# Altium PCB PCB2.PcbDoc
Units mm, origin at the board's own origin, x right, y up, seen from the top; angles counter-clockwise.
Board outline 275.08 x 77 mm, 2 copper layers (Top Layer, Bottom Layer); 16 components, 40 nets, 152 pads, 16 vias.
Unrouted connection lines stored in the file: 15.
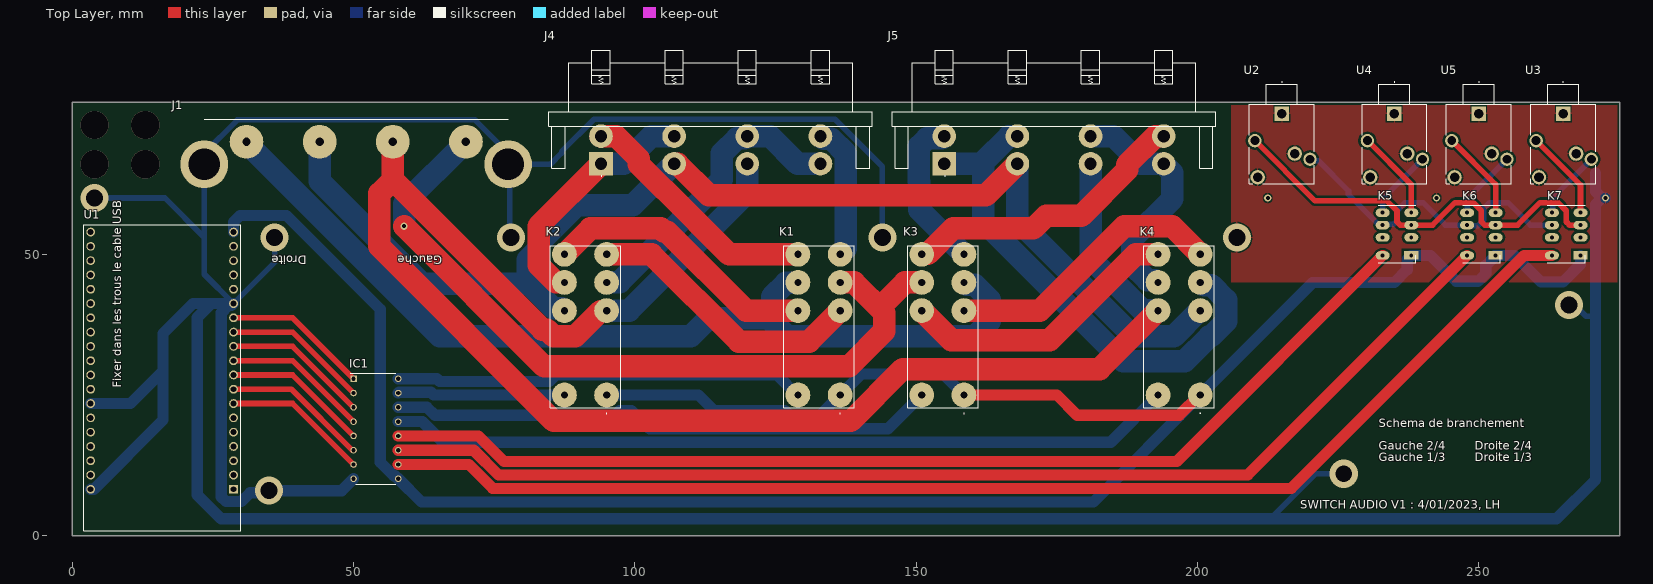
[diagram p0: Top Layer view]
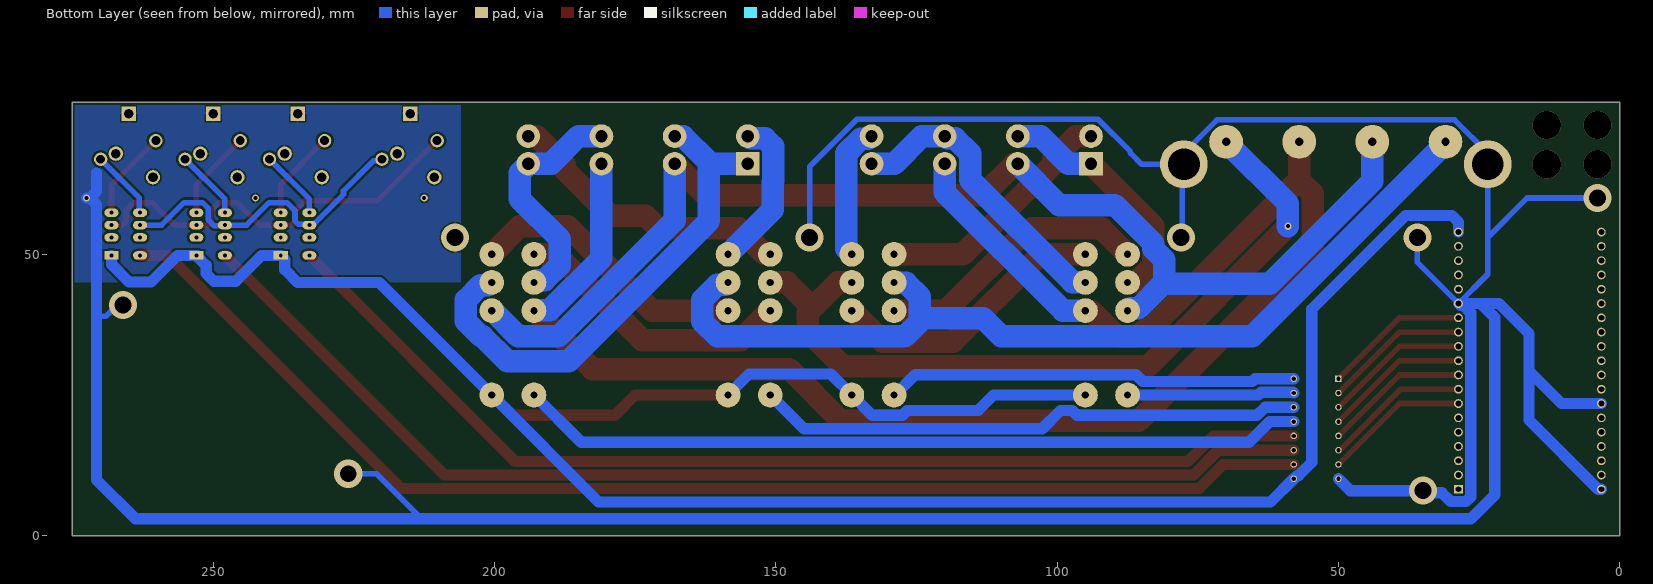
[diagram p1: Bottom Layer view, seen from below]
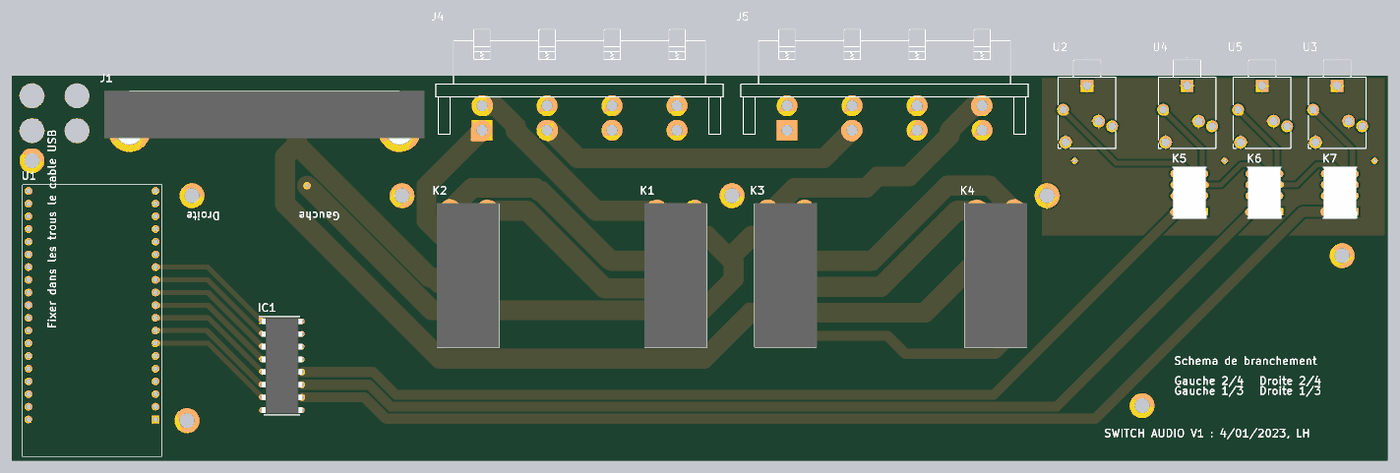
[diagram p2: 3D render of the assembled board from above, using the file's embedded part models]

## Layer stack, top to bottom
Top Solder: solder mask 0.0102, Solder Resist, Dk 3.5
Top Layer: signal copper 0.0356
Dielectric 1: dielectric 0.32, FR-4, Dk 4.8
Bottom Layer: signal copper 0.0356
Bottom Solder: solder mask 0.0102, Solder Resist, Dk 3.5

## Board outline
0,0 275.082,0 275.082,77 0,77

## Design rules (kind name [scope] priority, off if disabled: settings)
BoardOutlineClearance Default [All] p1: gap=0.5 ignorepadtopadclearanceinfootprint=FALSE
Clearance [All] p1: gap=0.4 ignorepadtopadclearanceinfootprint=FALSE
HoleSize [All] p1: absolutevalues=TRUE maxlimit=6.3 minlimit=0.5 maxpercent=80.000 minpercent=20.000
HoleToHoleClearance [All] p1: gap=1 allowstackedmicrovias=TRUE
PasteMaskExpansion [All] p1: expansion=0.2
PolygonConnect [All] p1: connectstyle=Relief reliefconductorwidth=0.254 reliefentries=4 polygonreliefangle="90 Angle" airgapwidth=0.254
RoutingVias [All] p1: holewidth=0.711 width=1.27 viastyle="Through Hole" minholewidth=0.711 minwidth=1.27 maxholewidth=0.711 maxwidth=1.27
SilkToSilkClearance [All] p1: silktosilkclearance=0.3
SilkToSolderMaskClearance [IsPad] p1: minsilkscreentomaskgap=0.2 clearancetoexposedcopper=FALSE
SolderMaskExpansion [All] p1: expansion=0.1 istentingtop=FALSE
UnRoutedNet [All] p1: checkbadconnections=TRUE
Width [All] p1: maxlimit=15 minlimit=0.254 preferedwidth=1
24 further rules are at their usual default settings.

## Components (designator, comment, footprint, x,y, rotation, side; value= is the part's Value field where it differs from the comment)
IC1 "ULN2003A" DIP794W56P254L1918H533Q16N 54,19 r0 top
J1 "FC681508" FC681508 31,70 r0 top
J4 "737763" 737763 94,66.1 r180 top
J5 "737763" 737763 155,66.1 r180 top
K1 "G2RL-24-DC5" G2RL24DC5 136.5,25 r90 top
K2 "G2RL-24-DC5" G2RL24DC5 95,25 r90 top
K3 "G2RL-24-DC5" G2RL24DC5 158.5,25 r90 top
K4 "G2RL-24-DC5" G2RL24DC5 200.5,25 r90 top
K5 "G6K-2P-Y-DC5" G6K2PYDC12 238,49.8 r180 top
K6 "G6K-2P-Y-DC5" G6K2PYDC12 253,49.8 r180 top
K7 "G6K-2P-Y-DC5" G6K2PYDC12 268.08,49.8 r180 top
U1 "ESP32-DEVKITC-32D" MODULE_ESP32-DEVKITC-32D 16,28 r180 top
U2 "734101" 734101 215,75 r270 top
U3 "734101" 734101 265,75 r270 top
U4 "734101" 734101 235,75 r270 top
U5 "734101" 734101 250,75 r270 top

## Footprints (in the part's own frame and the unit in brackets; to place one, negate y for a bottom-side part, rotate by r counter-clockwise, add the part's x,y. Pads: shape width x height; smd on the part's side, far side on the other; paste and mask are expansions set on the pad)
734101 [mm]
  rect 2.55x2.55 hole 1.7: 1(0,0)
  round 2.37 hole 1.58: 2(8.1,5) 5(4.8,-4.8)
  round 2.55 hole 1.7: 3(7.1,2.3) 4(11.3,-4.3)
  silkscreen extent -5.7,-5.75 12.5,5.75
737763 [mm]
  rect 4.2x4.2 hole 2.2: 1(0,0)
  round 4.2 hole 2.2: 2(0,-4.9) 3(-13,0) 4(-13,-4.9) 5(-26,0) 6(-26,-4.9) 7(-39,0) 8(-39,-4.9)
  silkscreen extent -48.25,-20.2 9.25,2.2
DIP794W56P254L1918H533Q16N [mm]
  rect 1.16x1.16 hole 0.76: 1(-3.97,8.89)
  round 1.16 hole 0.76: 2(-3.97,6.35) 3(-3.97,3.81) 4(-3.97,1.27) 5(-3.97,-1.27) 6(-3.97,-3.81) 7(-3.97,-6.35) 8(-3.97,-8.89) 9(3.97,-8.89) 10(3.97,-6.35) 11(3.97,-3.81) 12(3.97,-1.27) 13(3.97,1.27) 14(3.97,3.81) 15(3.97,6.35) 16(3.97,8.89)
  silkscreen extent -4.55,-9.84 3.55,9.84, body extent -4.11,-9.59 4.11,9.59, height 5.33
FC681508 [mm]
  round 6 hole 1.5: 1(0,0) 2(13,0) 3(26,0) 4(39,0)
  round 8.49 hole 5.66: MH1(-7.5,-4) MH2(46.5,-4)
  silkscreen extent -7.5,4 46.5,4, body extent -12.5,-6.71 51.5,4, height 25.1
G2RL24DC5 [mm]
  round 4.4 hole 1.3: 1(0,0) 2(15,0) 3(20,0) 4(25,0) 5(25,7.5) 6(20,7.5) 7(15,7.5) 8(0,7.5)
  silkscreen extent -3.3,-2.5 26.5,10, body extent -2.3,-2.5 26.5,10, height 15.8
G6K2PYDC12 [mm]
  rect 2.5x1.5 hole 0.7: 1(0,0)
  oval 2.5x1.5 hole 0.7: 2(0,-3.2) 3(0,-5.4) 4(0,-7.6) 5(5.08,-7.6) 6(5.08,-5.4) 7(5.08,-3.2) 8(5.08,0)
  silkscreen extent -0.81,-8.91 5.89,1.29, body extent -0.71,-8.81 5.79,1.19, height 5.09
MODULE_ESP32-DEVKITC-32D [mm]
  rect 1.56x1.56 hole 1.04: 1(-12.7,19.76)
  round 1.56 hole 1.04: 2(-12.7,17.22) 3(-12.7,14.68) 4(-12.7,12.14) 5(-12.7,9.6) 6(-12.7,7.06) 7(-12.7,4.52) 8(-12.7,1.98) 9(-12.7,-0.56) 10(-12.7,-3.1) 11(-12.7,-5.64) 12(-12.7,-8.18) 13(-12.7,-10.72) 14(-12.7,-13.26) 15(-12.7,-15.8) 16(-12.7,-18.34) 17(-12.7,-20.88) 18(-12.7,-23.42) 19(-12.7,-25.96) 20(12.7,19.76) 21(12.7,17.22) 22(12.7,14.68) 23(12.7,12.14) 24(12.7,9.6) 25(12.7,7.06) 26(12.7,4.52) 27(12.7,1.98) 28(12.7,-0.56) 29(12.7,-3.1) 30(12.7,-5.64) 31(12.7,-8.18) 32(12.7,-10.72) 33(12.7,-13.26) 34(12.7,-15.8) 35(12.7,-18.34) 36(12.7,-20.88) 37(12.7,-23.42) 38(12.7,-25.96)
  silkscreen extent -13.95,-27.25 13.95,27.15

## Part data
IC1: "Integrated Circuit", Manufacturer_Name=STMicroelectronics, Mouser Part Number=511-ULN2003A, Arrow Part Number=ULN2003A, Arrow Price/Stock=https://www.arrow.com/en/products/uln2003a/stmicroelectronics?region=nac, Datasheet Link=http://www.st.com/web/en/resource/technical/document/datasheet/CD00001244.pdf, Height=5.33mm, Manufacturer_Part_Number=ULN2003A, Mouser Price/Stock=https://www.mouser.co.uk/ProductDetail/STMicroelectronics/ULN2003A?qs=FOlmdCx%252BAA1P2avu3tWCRw%3D%3D
J1: "Connector", Manufacturer_Name="CLIFF ELECTRONIC COMPONENTS", Datasheet Link=https://componentsearchengine.com/Datasheets/2/FC681508.pdf, Height=25mm, Manufacturer_Part_Number=FC681508
J4 J5: "Connector", Manufacturer_Name="Tru Components", Datasheet Link=https://asset.conrad.com/media10/add/160267/c1/-/en/001570036DS01/fiche-technique-1570036-fiche-haut-parleur-embase-femelle-horizontale-https://asset.conrad.com/media10/add/160267/c1/-/en/001570036DS01/datasheet-1570036-tru-components-737763-audio-jack-so, Height=29.6mm, Manufacturer_Part_Number=737763
K1 K2 K3 K4: "Relay or Contactor", Manufacturer_Name="Omron Electronics", Mouser Part Number=653-G2RL-24-DC5, Arrow Part Number=G2RL-24-DC5, Arrow Price/Stock=https://www.arrow.com/en/products/g2rl-24-dc5/omron?region=nac, Datasheet Link=https://www.mouser.in/datasheet/2/307/en-g2rl-472571.pdf, Height=15.7mm, Manufacturer_Part_Number=G2RL-24-DC5, Mouser Price/Stock=https://www.mouser.co.uk/ProductDetail/Omron-Electronics/G2RL-24-DC5?qs=HDDQUw%2F3PhqJg7sIn7s%2Fiw%3D%3D
K5 K6 K7: "Relay or Contactor", Manufacturer_Name="Omron Electronics", Mouser Part Number=653-G6K-2P-Y-DC5, Datasheet Link=https://omronfs.omron.com/en_US/ecb/products/pdf/en-g6k.pdf, Height=5.3mm, Manufacturer_Part_Number=G6K-2P-Y-DC5, Mouser Price/Stock=https://www.mouser.co.uk/ProductDetail/Omron-Electronics/G6K-2P-Y-DC5?qs=HDDQUw%2F3PhrvM4dCY49XOA%3D%3D
U1: "Eval Board For Esp-Wroom-32", Package=None, Availability=Unavailable, MP=ESP32-DEVKITC-32D, Price=None
U2 U3 U4 U5: "Undefined or Miscellaneous", Manufacturer_Name="Tru Components", Datasheet Link=https://asset.conrad.com/media10/add/160267/c1/-/en/001566157DS00/fiche-technique-1566157-jack-35-mm-embase-femelle-horizontale-tru-components-734101-nombre-de-poles-num-3-stereo-noir-1-pcs.pdf, Height=6mm, Manufacturer_Part_Number=734101

## Via types
v1: diameter 5, hole 3, Top Layer to Bottom Layer, 8 vias
v2: diameter 1.27, hole 0.711, Top Layer to Bottom Layer, 4 vias
v3: diameter 5, hole 5, Top Layer to Bottom Layer, 4 vias

## Nets (pads, with @x,y where several pads share a name; then routed paths per layer and width w, separated by ;. In a path a pad name is that pad's centre, name@x,y a point inside that pad or via, vN(x,y) a via of type N, cw(c..) or ccw(c..) an arc to the next point about the centre after c; other vN are vias at no path point)
+5: IC1.9 K1.1 K2.1 K3.1 K4.1 K5.1 K6.1 K7.1 U1.19 | length 422
  Top Layer w2: K3.1 175.02,25 178.62,21.4 196.746,21.4 200.346,25 K4.1
  Bottom Layer w2: U1.19 28.7,55.728 29.872,56.9 38.1,56.9 54.75,40.25 54.75,13.07 57.15,10.67 57.41,10.67 IC1.9 62.08,6 181.5,6 K4.1 220.5,45 235,45 237.27,47.27 237.27,49.07 K5.1 241.415,49.8 246.015,45.2 249.825,45.2 251.25,46.625 251.25,48.05 252.75,49.55 252.75,49.7 252.85,49.8 256.353,49.8 261.053,45.1 264.947,45.1 268.08,48.233 K7.1 ; K2.1 111.297,25 114.047,22.25 126.659,22.25 127.509,21.4 132.9,21.4 K1.1 140.25,28.75 154.75,28.75 K3.1
AMPL+: J1.4 K1.3 K3.6 | length 140.5
  Top Layer w4: v2(59,55) 83.9,30.1 138.1,30.1 144.343,36.343 144.343,39.657 139,45 K1.3 ; 143.5,40.5 148,45 K3.6
  Bottom Layer w4: v2(59,55) 59,59 J1.4
AMPL-: J1.3 J4.5 J5.5 K2.2 K4.7 | length 301.9
  Top Layer w4: J1.3 57,63.223 ; K2.2 94.923,39.923 93.929,39.923 89.405,35.4 85.595,35.4 84.37,36.625 83.598,36.625 57,63.223 ; K4.7 182.6,29.6 147.605,29.6 138.405,20.4 85.595,20.4 54.6,51.395 54.6,60.823 57,63.223
  Bottom Layer w4: K2.2 99,40 120,61 J4.5 ; J5.5 181,49.272 190.196,40.077 192.923,40.077 K4.7
AMPR+: J1.1 K1.6 K3.3 | length 169.8
  Bottom Layer w4: J1.1 31,69.777 65.377,35.4 109.935,35.4 113.137,38.602 124.4,38.602 ; K1.6 128.923,44.923 126.867,44.923 124.4,42.457 124.4,38.095 127.095,35.4 160.405,35.4 163.1,38.095 163.1,41.905 160.405,44.6 159.008,44.6 158.608,45 K3.3
AMPR-: J1.2 J4.3 J5.3 K2.7 K4.2 | length 215.9
  Top Layer w4: J4.3 107.038,66.062 107.606,66.062 113.168,60.5 162.4,60.5 J5.3
  Bottom Layer w4: J1.2 44,63 62.25,44.75 81.245,44.75 85.595,40.4 86.992,40.4 87.392,40 K2.7 ; 81,45.4 81,49.07 82.9,50.97 82.9,51.905 89.744,58.749 99.649,58.749 J4.3 ; J5.3 168,56.05 188.65,35.4 195.792,35.4 200.392,40 K4.2
GND: IC1.8 J1.MH1 J1.MH2 U1.14 U1.20 U1.26 U2.1 U2.3 U2.4 U3.1 U3.3 U3.4 U4.1 U4.3 U4.4 U5.1 U5.3 U5.4 | length 717.3
  Bottom Layer w1: v1(4,60) 16.5,60 23.5,53 ; v1(36,53) 36,48.56 U1.14 23.5,46.46 23.5,53 ; v1(78,53) 77.75,53.25 77.75,65.75 J1.MH2 ; v1(144,53) 144,65.565 135.565,74 92.757,74 87,68.243 87,68 85,66 J1.MH2 ; 213,3 221,11 v1(226,11) ; v1(266,41) 267.082,41 269.082,39 270.75,39 ; 23.5,53 J1.MH1 23.5,68.015 29.385,73.9 71.615,73.9 77.5,68.015 J1.MH2
  Bottom Layer w2: U1.20 3.843,8.24 16.18,20.577 16.18,29.283 ; U1.26 10.377,23.48 16.18,29.283 ; v1@34.972,8 34.582,7.611 31.611,7.611 30.06,6.06 27.34,6.06 26.52,6.88 26.52,39.623 27.797,40.9 28.34,40.9 U1.14 24.75,41.26 ; v1(35,8) 47.92,8 IC1.8 ; 270.75,64.426 270.75,61.172 v2@271.922,60 ; 16.18,29.283 16.18,35.93 21.51,41.26 24.75,41.26 ; 24.75,41.26 22.25,38.76 22.25,7.25 26.5,3 213,3 263.828,3 270.75,9.922 270.75,39 270.75,58.828 v2@271.922,60 ; v2@271.922,60 v2(272.5,60) v2@271.922,60
  other v1: 207,53
  other v2: 212.5,60 242.5,60
INPUT1: IC1.5 U1.9 | length 25.8
  Top Layer w1: U1.9 39.2,28.56 IC1.5
INPUT2: IC1.6 U1.8 | length 25.8
  Top Layer w1: U1.8 38.98,26.02 49.779,15.221 49.999,15.221 IC1.6
INPUT3: IC1.7 U1.7 | length 25.8
  Top Layer w1: U1.7 39.2,23.48 IC1.7
Lin1: K5.4 U4.5 | length 16
  Top Layer w1: U4.5 238,62.4 K5.4
Lin2: K6.4 U5.5 | length 16
  Top Layer w1: U5.5 253,62.4 K6.4
Lin3: K7.4 U3.5 | length 16.1
  Top Layer w1: U3.5 268.08,62.32 K7.4
Lout: K5.3 K6.3 K7.3 U2.5 | length 74.2
  Top Layer w1: U2.5 220.9,59.5 233.716,59.5 235.46,57.756 235.46,55.786 236.046,55.2 241.791,55.2 245.791,59.2 249.016,59.2 250.46,57.756 250.46,55.786 251.046,55.2 256.908,55.2 260.908,59.2 264.096,59.2 265.54,57.756 265.54,55.786 266.126,55.2 K7.3
Rin1: K5.5 U4.2 | length 12.4
  Bottom Layer w1: K5.5 232.92,59.82 U4.2
Rin2: K6.5 U5.2 | length 12.4
  Bottom Layer w1: K6.5 247.92,59.82 U5.2
Rin3: K7.5 U3.2 | length 12.4
  Bottom Layer w1: K7.5 263.121,57.521 263.121,60.021 U3.2
Rout: K5.6 K6.6 K7.6 U2.2 | length 57.2
  Bottom Layer w1: U2.2 220.262,66.638 221.482,66.638 226.836,61.284 226.836,60.651 232.287,55.2 K5.6 233.073,55.353 234.874,55.353 235.46,55.939 235.46,57.756 236.904,59.2 240.052,59.2 244.052,55.2 K6.6 248.063,55.057 249.807,55.057 250.85,56.1 250.85,58.146 251.904,59.2 255.169,59.2 259.169,55.2 K7.6
S12L: J4.6 J4.7 K2.3 | length 53.6
  Bottom Layer w4: K2.3 95.077,45.077 97.327,45.077 115.5,63.25 115.5,67.964 118.136,70.6 119.546,70.6 119.946,71 124.05,71 128.95,66.1 J4.7
S12R: J4.1 J4.4 K2.6 | length 43.5
  Top Layer w4: K2.6 87.423,45.077 85.918,45.077 82.9,48.095 82.9,55 J4.1
  Bottom Layer w4: J4.1 98.05,66.1 102.95,71 J4.4
S34L: J5.6 J5.7 K4.6 | length 42.5
  Bottom Layer w4: J5.6 185.05,71 189.95,66.1 J5.7 194,66.046 195.553,64.493 195.553,59.87 188.4,52.717 188.4,48.095 191.095,45.4 192.492,45.4 192.892,45 K4.6
S34R: J5.1 J5.4 K4.3 | length 91.5
  Bottom Layer w4: J5.1 161.9,66.1 ; J5.4 167.962,70.962 166.498,70.962 161.9,66.364 161.9,66.1 ; K4.3 200.608,45 201.008,44.6 201.183,44.6 201.241,44.541 202.464,44.541 205.1,41.905 205.1,38.095 202.405,35.4 202.123,35.4 197.723,31 186.827,31 161.9,55.927 161.9,66.1
SI1P: IC1.12 K5.8 | length 192
  Top Layer w2: IC1.12 72.239,17.73 76.769,13.2 196.32,13.2 K5.8
SI2P: IC1.11 K6.8 | length 207.9
  Top Layer w2: IC1.11 71.385,15.19 75.775,10.8 208.92,10.8 K6.8
SI3P: IC1.10 K7.8 | length 223.9
  Top Layer w2: IC1.10 70.531,12.65 74.781,8.4 216.65,8.4 258.05,49.8 K7.8
SP1P: IC1.16 K1.8 | length 73.2
  Bottom Layer w2: IC1.16 64.802,27.89 65.292,27.4 84.809,27.4 86.009,28.6 125.246,28.6 128.846,25 K1.8
SP2P: IC1.15 K2.8 | length 29.8
  Bottom Layer w2: IC1.15 58.11,25.49 63.808,25.49 64.298,25 K2.8
SP3P: IC1.14 K3.8 | length 97.8
  Bottom Layer w2: IC1.14 63.093,22.81 64.503,21.4 96.491,21.4 97.341,22.25 99.419,22.25 102.669,19 145,19 K3.8
SP4P: IC1.13 K4.8 | length 140
  Bottom Layer w2: IC1.13 62.239,20.27 65.909,16.6 184.6,16.6 K4.8
SPEAKER1: IC1.1 U1.13 | length 25.8
  Top Layer w1: U1.13 39.2,38.72 IC1.1
SPEAKER2: IC1.2 U1.12 | length 25.8
  Top Layer w1: U1.12 39.2,36.18 IC1.2
SPEAKER3: IC1.3 U1.11 | length 25.8
  Top Layer w1: U1.11 39.2,33.64 IC1.3
SPEAKER4: IC1.4 U1.10 | length 25.8
  Top Layer w1: U1.10 39.2,31.1 IC1.4
SW1L+: J4.8 K1.4 | length 24.1
  Bottom Layer w4: J4.8 133.054,71 133.454,70.6 133.541,70.6 133.571,70.571 134.893,70.571 137.5,67.964 137.5,51 K1.4
SW1L-SW2L: K1.2 K2.4 | length 50.2
  Top Layer w4: K2.4 103,50 118.5,34.5 131,34.5 K1.2
SW1R+: J4.2 K1.5 | length 44.3
  Top Layer w4: J4.2 94.038,70.962 96.732,70.962 100.75,66.944 100.75,65.986 105.136,61.6 105.194,61.6 116.794,50 K1.5
SW1R-SW2R: K1.7 K2.5 | length 49.5
  Top Layer w4: K2.5 92.1,54.6 104.623,54.6 105.223,54 105.777,54 119.777,40 K1.7
SW3L+: J5.8 K3.5 | length 52.3
  Top Layer w4: K3.5 151.077,50.077 152.071,50.077 156.595,54.6 170.85,54.6 173.1,56.85 179.35,56.85 187.5,65 187.5,65.964 192.498,70.962 193.962,70.962 J5.8
SW3L-SW4L: K3.7 K4.5 | length 50.5
  Top Layer w4: K3.7 156.25,34.75 173.75,34.75 189,50 K4.5
SW3R+: J5.2 K3.4 | length 27.8
  Bottom Layer w4: J5.2@155,70.908 154.946,70.962 154.908,70.962 154.546,70.6 151.906,70.6 150.5,69.194 150.5,63.006 150.6,62.906 150.6,57.9 K3.4
SW3R-SW4R: K3.2 K4.4 | length 50.3
  Top Layer w4: K3.2 172,40 187,55 195.5,55 K4.4
pads on no net: K5.2 K5.7 K6.2 K6.7 K7.2 K7.7 U1.1 U1.2 U1.3 U1.4 U1.5 U1.6 U1.15 U1.16 U1.17 U1.18 U1.21 U1.22 U1.23 U1.24 U1.25 U1.27 U1.28 U1.29 U1.30 U1.31 U1.32 U1.33 U1.34 U1.35 U1.36 U1.37 U1.38
copper on no net:
  other v3: 4,66 13,66 4,73 13,73

## Polygon pours and split planes (outlines as drawn)
GND on Bottom Layer "NONET_L-01_P-001" (solid, remove dead copper, pour order 0): 206,77 206,45 275,45 275,77
GND on Top Layer "NONET_L-01_P-001" (solid, remove dead copper, pour order 1): 206,76.5 274.6,76.5 274.6,45 206,45

## Silkscreen, mask and mechanical layers (free items; w line width, h text height)
Top Overlay:
  text "Droite" at 41.746,49.746 h1.52 r180
  text "Gauche" at 65.746,49.746 h1.52 r180
  text "Fixer dans les trous le cable USB" at 8.746,26.254 h1.52 r90
  text "Schema de branchement" at 232.254,19.254 h1.52
  text "Gauche 2/4" at 232.254,15.254 h1.52
  text "Droite 2/4" at 249.254,15.254 h1.52
  text "Gauche 1/3" at 232.254,13.254 h1.52
  text "Droite 1/3" at 249.254,13.254 h1.52
  text "SWITCH AUDIO V1 : 4/01/2023, LH" at 218.254,4.762 h1.52
Mechanical 1:
  lines w0.254: 0,1 ccw(c1,1) 1,0 274,0 ccw(c274,1) 275,1 275,76 ccw(c274,76) 274,77 1,77 ccw(c1,76) 0,76 0,1